# EAGLE board center_v1 (EAGLE 9.5.0)
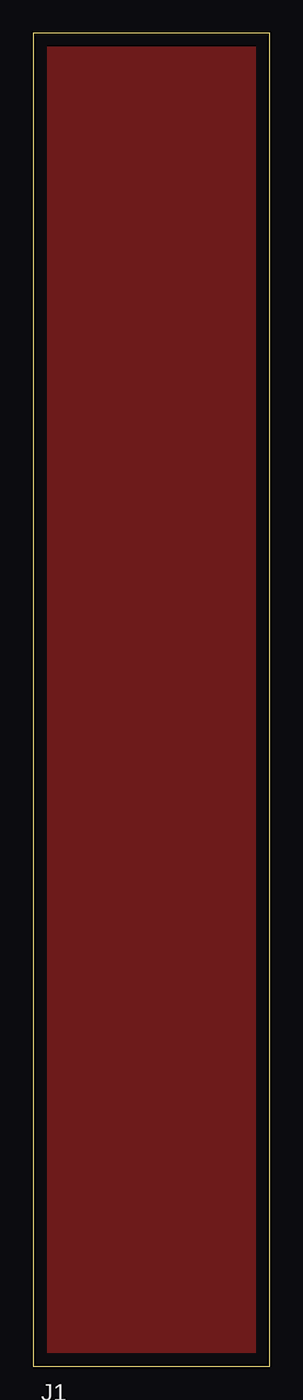
[diagram p0: board, top side]
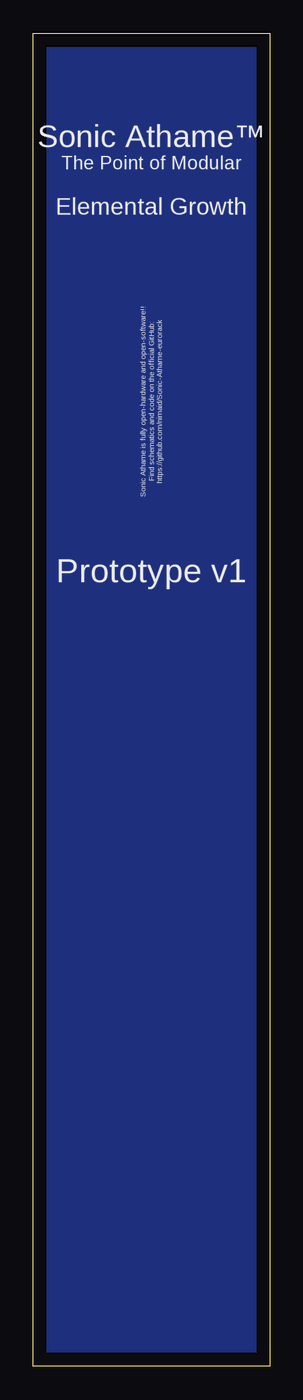
[diagram p1: board, bottom side, seen from below]

Size 17.76 x 100 mm. Coordinates in mm from the lower left corner, seen from the top.
Outline: 0,0 17.76,0 17.76,100 0,100 0,0
Copper layers (1*16): Top 0.035mm / dielectric 1.5mm / Bottom 0.035mm
Design rules "default": minimum track width 6mil, minimum drill 0.35mm, track to track 6mil, track to pad 6mil, pad to pad 6mil, via to via 6mil, smd to smd 6mil, copper to edge 40mil, drill to drill 6mil, minimum pad ring 10mil, minimum via ring 8mil, stop-mask expansion 4mil, vias tented up to drill 0mil, thermal gap 10mil

## Footprints (pad centres in the part's own frame; a part is rotated, then mirrored left to right if it is on the bottom)
C050-024X044 = drill 0.813 octagon: 1 -2.54,0; 2 2.54,0
WQP_PJ_301M6 = drill 1.016 pad 1.778 octagon: P1 0,-5.715; P2 0,-3.38; P3 0,4.92 | hole 2.2: 0,0
0207/2V = drill 0.813 octagon: 1 -1.27,0; 2 1.27,0

## Placement (x,y rotation side)
C1  10u  [C050-024X044]  3.81,-39.37 0 top  (outside the outline)
C2  10u  [C050-024X044]  13.97,-59.69 0 top  (outside the outline)
C3  10u  [C050-024X044]  13.97,-95.25 0 top  (outside the outline)
C4  10u  [C050-024X044]  3.81,-146.05 0 top  (outside the outline)
C5  10u  [C050-024X044]  11.43,-146.05 0 top  (outside the outline)
C6  10u  [C050-024X044]  19.05,-146.05 0 top  (outside the outline)
J1  WQP-PJ398SM6  [WQP_PJ_301M6]  5.08,-8.89 0 top  (outside the outline)
J2  WQP-PJ398SM6  [WQP_PJ_301M6]  5.08,-29.21 0 top  (outside the outline)
J3  WQP-PJ398SM6  [WQP_PJ_301M6]  5.08,-49.53 0 top  (outside the outline)
J4  WQP-PJ398SM6  [WQP_PJ_301M6]  5.08,-64.77 0 top  (outside the outline)
J5  WQP-PJ398SM6  [WQP_PJ_301M6]  5.08,-85.09 0 top  (outside the outline)
J6  WQP-PJ398SM6  [WQP_PJ_301M6]  5.08,-100.33 0 top  (outside the outline)
J7  WQP-PJ398SM6  [WQP_PJ_301M6]  5.08,-120.65 0 top  (outside the outline)
J8  WQP-PJ398SM6  [WQP_PJ_301M6]  15.24,-120.65 0 top  (outside the outline)
J9  WQP-PJ398SM6  [WQP_PJ_301M6]  25.4,-120.65 0 top  (outside the outline)
J10  WQP-PJ398SM6  [WQP_PJ_301M6]  5.08,-135.89 0 top  (outside the outline)
J11  WQP-PJ398SM6  [WQP_PJ_301M6]  15.24,-135.89 0 top  (outside the outline)
J12  WQP-PJ398SM6  [WQP_PJ_301M6]  25.4,-135.89 0 top  (outside the outline)
R1  100k  [0207/2V]  2.54,-19.05 0 top  (outside the outline)
R2  100k  [0207/2V]  2.54,-74.93 0 top  (outside the outline)
R3  100k  [0207/2V]  2.54,-110.49 0 top  (outside the outline)
R4  100k  [0207/2V]  25.4,-146.05 0 top  (outside the outline)
R5  100k  [0207/2V]  2.54,-151.13 0 top  (outside the outline)
R6  100k  [0207/2V]  8.89,-151.13 0 top  (outside the outline)

## Library data of the parts
C1-C6 = SonicAthame; SPICEPREFIX: C
J1-J12 = SonicAthame
R1-R6 = SonicAthame; SPICEPREFIX: R

## Nets
N$1: C1.1 J1.P2
N$2: C1.2 J2.P2 R1.2
N$3: J1.P1 J2.P1 R1.1
N$4: C2.1 J3.P2
N$5: C2.2 J4.P2 R2.2
N$6: J3.P1 J4.P1 R2.1
N$7: C3.1 J5.P2
N$8: C3.2 J6.P2 R3.2
N$9: J5.P1 J6.P1 R3.1
N$10: C4.1 J7.P2
N$11: C4.2 J8.P2 R4.2
N$12: J7.P1 J8.P1 R4.1
N$13: C5.1 J9.P2
N$14: C5.2 J10.P2 R5.2
N$15: J9.P1 J10.P1 R5.1
N$16: C6.1 J11.P2
N$17: C6.2 J12.P2
N$18: J11.P1 J12.P1 R6.1 R6.2

## Tracks (layer width: path | path; a pad name or v marks a point on that pad's centre or on a via)
GND
  pour Bottom: 0,0 17.78,0 17.78,100.33 0,100.33
  pour Top: 0,0 17.78,0 17.78,100.33 0,100.33
N$1  (1 unrouted)
N$2  (2 unrouted)
N$3  (2 unrouted)
N$4  (1 unrouted)
N$5  (2 unrouted)
N$6  (2 unrouted)
N$7  (1 unrouted)
N$8  (2 unrouted)
N$9  (2 unrouted)
N$10  (1 unrouted)
N$11  (2 unrouted)
N$12  (2 unrouted)
N$13  (1 unrouted)
N$14  (2 unrouted)
N$15  (2 unrouted)
N$16  (1 unrouted)
N$17  (1 unrouted)
N$18  (3 unrouted)

## Text on the board
bNames: Sonic Athame™ | The Point of Modular | Elemental Growth | Sonic Athame is fully open-hardware and open-software!! / Find schematics and code on the official GitHub: / https://github.com/nimaid/Sonic-Athame-eurorack | Prototype v1